# Altium PCB cat-badge2 PCB.PcbDoc
Units mm, origin at the board's own origin, x right, y up, seen from the top; angles counter-clockwise.
Board outline 37.37 x 40.65 mm, 2 copper layers (Top Layer, Bottom Layer); 7 components, 5 nets, 18 pads, 0 vias.
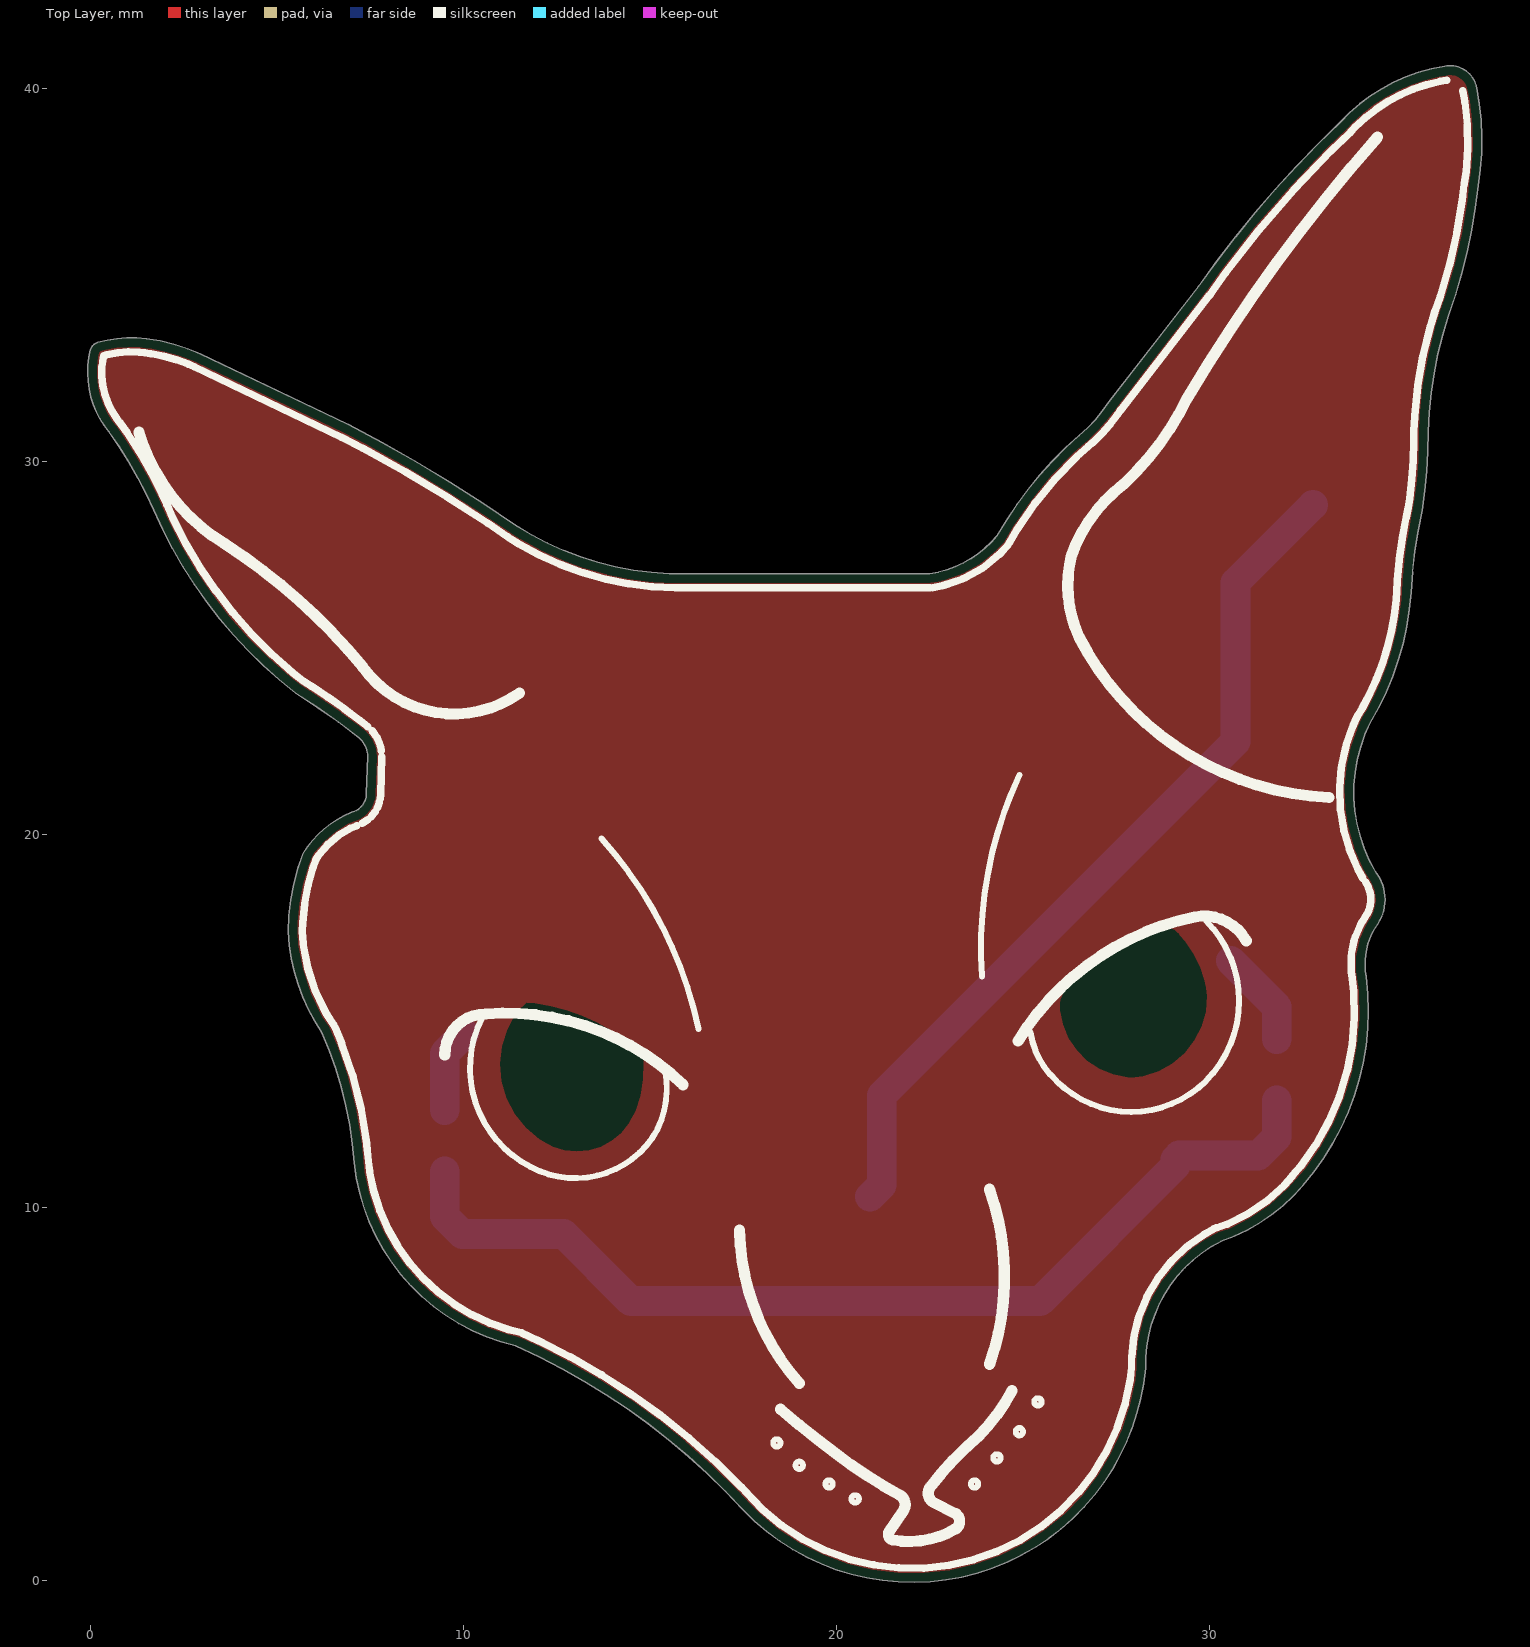
[diagram p0: Top Layer view]
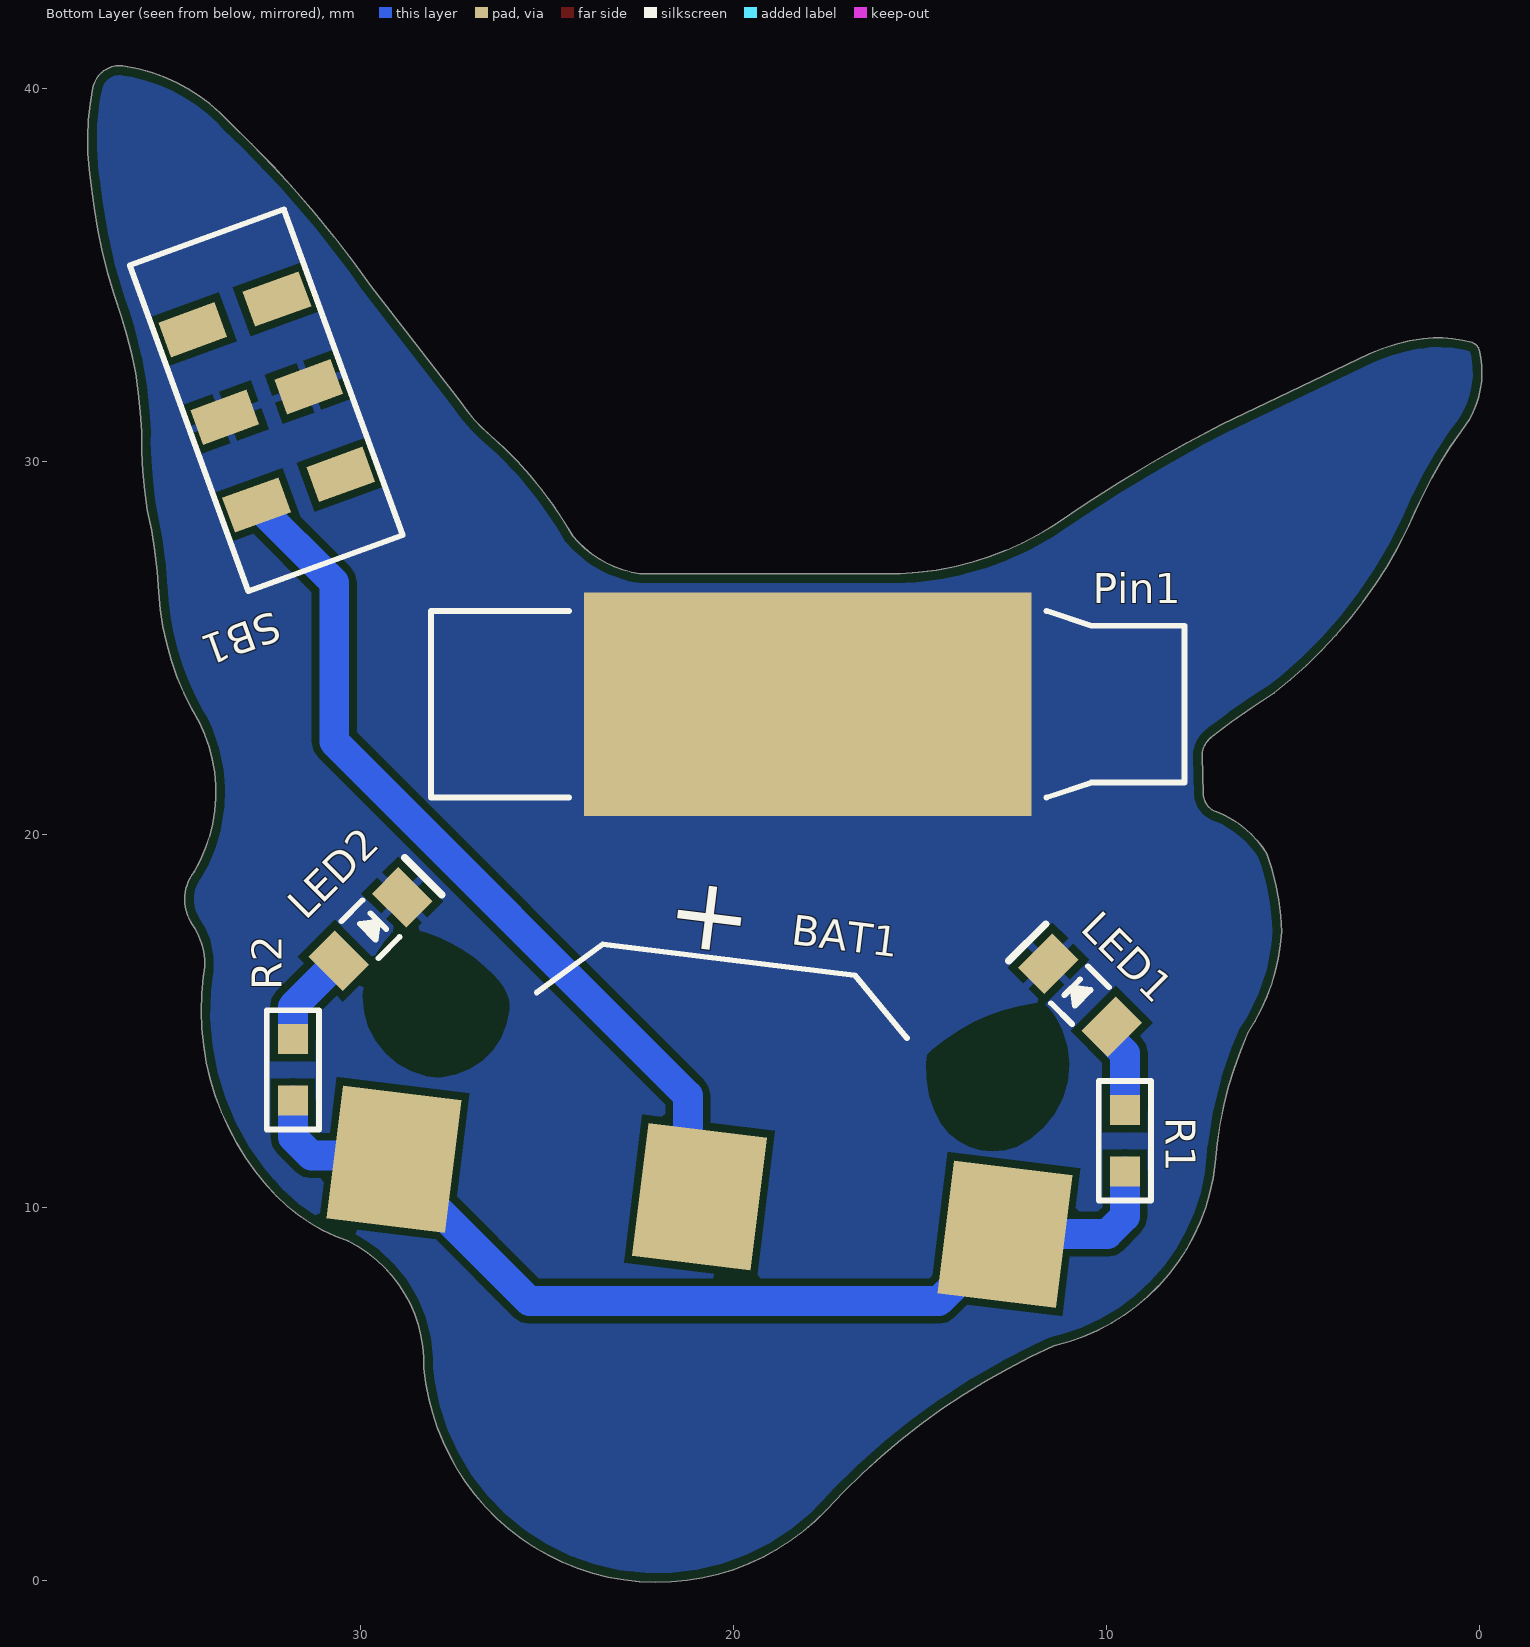
[diagram p1: Bottom Layer view, seen from below]
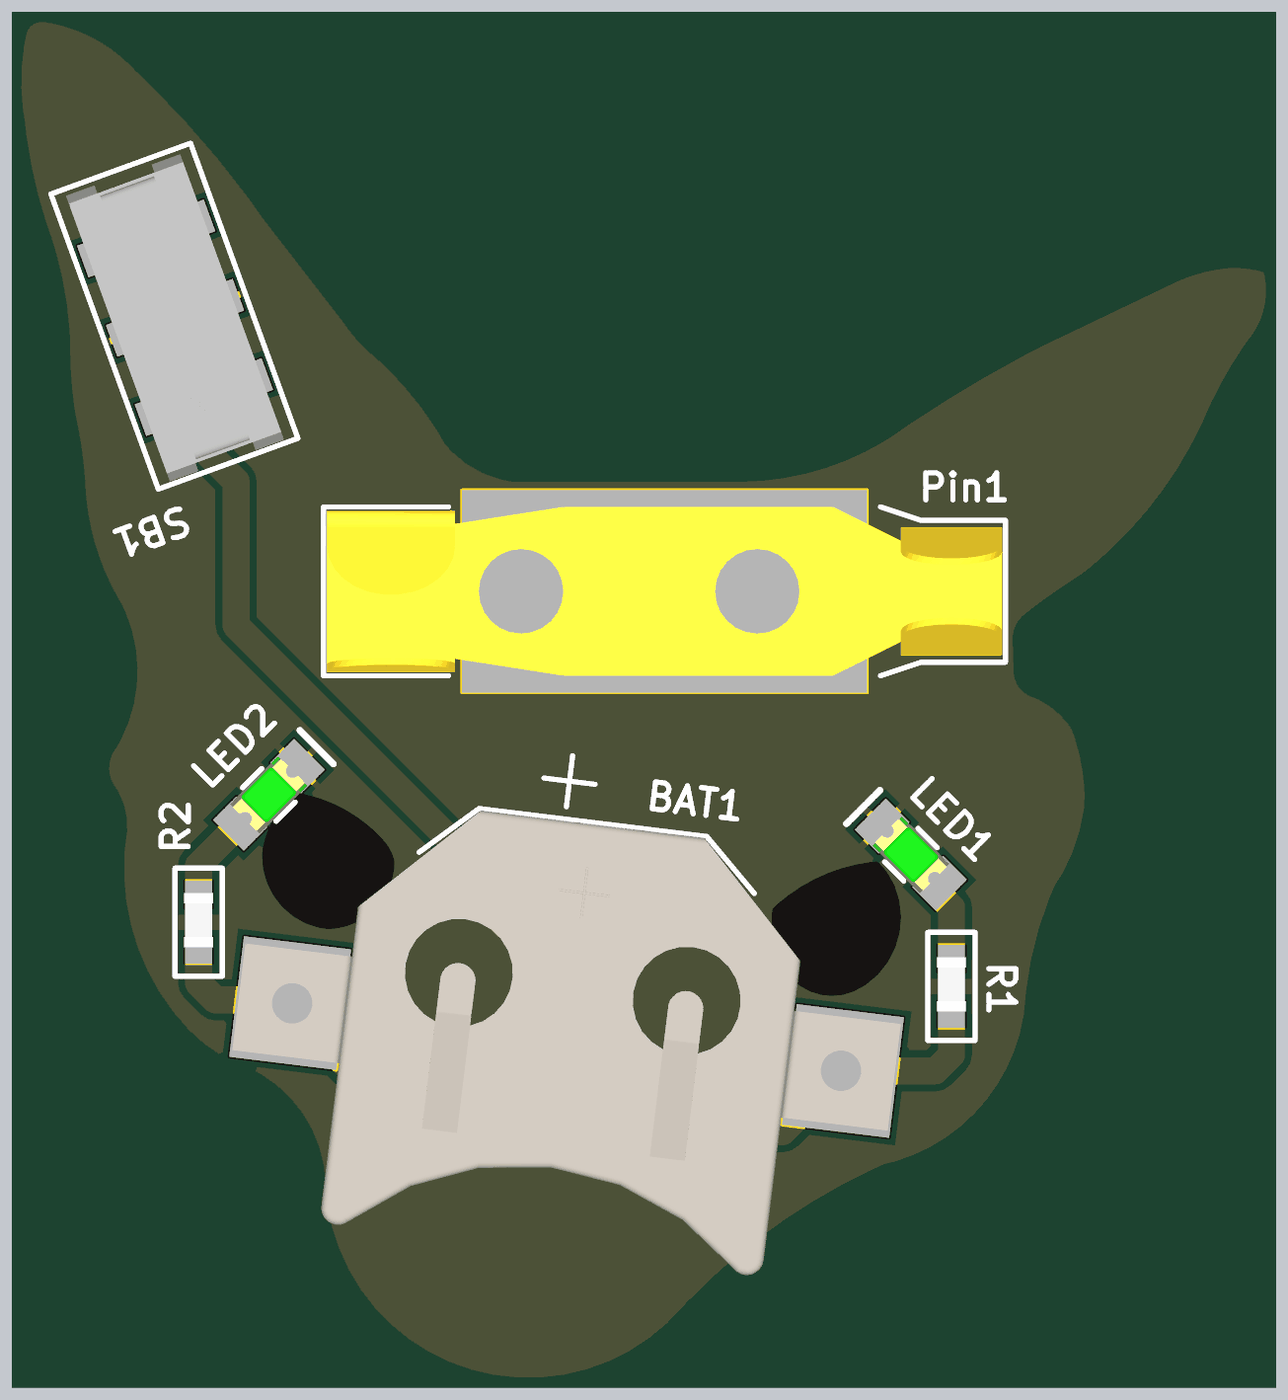
[diagram p2: 3D render of the assembled board from below, using the file's embedded part models]

## Layer stack, top to bottom
Top Solder: solder mask 0.0102, Solder Resist, Dk 3.5
Top Layer: signal copper 0.0356
Dielectric 1: dielectric 0.32, FR-4, Dk 4.8
Bottom Layer: signal copper 0.0356
Bottom Solder: solder mask 0.0102, Solder Resist, Dk 3.5

## Board outline
6.2,14.7 cw(c10.7,17.7) 5.3,17.4 cw(c11.745,17.261) 5.7,19.5 cw(c8.024,18.072) 7,20.6 ccw(c6.867,21.117) 7.4,21.1 7.431,22.1 ccw(c6.775,22.1) 7.2,22.6 ccw(c-4.45,7.9) 5.5,23.8 cw(c13.177,33.677) 1.7,28.7 ccw(c-9.05,23.95) 0.5,30.8 cw(c2.45,32.4) 0,33 cw(c0.3,32.9) 0.2,33.2 cw(c1.1,30) 1.5,33.3 cw(c0.85,28.25) 2.942,32.892 6.9,31 cw(c-11.31,-4.45) 11.4,28.3 ccw(c15.797,35.07) 16,27 22.5,27 ccw(c22.087,29.842) 24.303,28.015 cw(c33.333,22.867) 26.5,30.7 ccw(c23.75,33.95) 27.3,31.6 29.7,34.7 cw(c54.217,17.367) 33.5,39.1 cw(c37.06,35.819) 36.3,40.6 cw(c36.446,39.891) 37.158,40.019 cw(c30.103,38.596) 37.2,37.4 cw(c22.119,39.006) 36.4,33.9 ccw(c46.95,30.45) 35.856,30.801 cw(c22.916,30.704) 35.7,28.7 ccw(c47.85,25.923) 35.4,26.5 cw(c27.675,27.005) 34.3,23 ccw(c38.06,21.14) 34.446,19.009 cw(c33.497,18.268) 34.5,17.6 ccw(c35.983,16.55) 34.2,16.2 cw(c27.088,15.301) 32.5,10.6 cw(c28.681,13.837) 30.3,9.1 ccw(c31.955,5.826) 28.289,5.701 cw(c21.73,6.362) 27.4,3 cw(c22.03,6.232) 17.5,1.9 ccw(c3.896,-10.531) 11.4,6.3 cw(c12.685,11.793) 7.075,11.205 ccw(c-3.3,10.466)

## Design rules (kind name [scope] priority, off if disabled: settings)
AcuteAngle [All] p1: minimum=3.50000000000000E+0001 checktracksonly=FALSE
BoardOutlineClearance "BoardOutlineClearance 1" [All] p1: gap=0.25 ignorepadtopadclearanceinfootprint=FALSE except(0: Arc-SplitContinuation Track-SplitContinuation SMDPad-SplitContinuation THPad-SplitContinuation Via-SplitContinuation Fill-SplitContinuation Poly-SplitContinuation Region-SplitContinuation Text-SplitContinuation) // Milling
BoardOutlineClearance "BoardOutlineClearance 2" [All] p2: gap=0.4 ignorepadtopadclearanceinfootprint=FALSE except(0: Arc-SplitContinuation Track-SplitContinuation SMDPad-SplitContinuation THPad-SplitContinuation Via-SplitContinuation Fill-SplitContinuation Poly-SplitContinuation Region-SplitContinuation Text-SplitContinuation) // V-Cut
Clearance "Clearance-1 1 Oz" [All] p1: gap=0.2 ignorepadtopadclearanceinfootprint=FALSE except(0.25: Arc-Hole Track-Hole SMDPad-Hole THPad-Hole Via-Hole Fill-Hole Poly-Hole Region-Hole Text-Hole) // Standart
DiffPairsRouting "DiffPairsRouting 1 Oz" [All] p1: maxlimit=0.254 minlimit=0.2 mostfreqgap=0.254 toplayer_minwidth=0.2 toplayer_maxwidth=0.381 toplayer_prefwidth=0.381 bottomlayer_minwidth=0.2 bottomlayer_maxwidth=0.381 bottomlayer_prefwidth=0.381 maxuncoupledlength=12.7
HoleSize "Minimum HoleSize" [IsPad] p1: absolutevalues=TRUE maxlimit=5.9 minlimit=0.6 maxpercent=80.000 minpercent=20.000
HoleSize "Minimum HoleSize VIA 1" [IsVia] p2: absolutevalues=TRUE maxlimit=5.9 minlimit=0.3 maxpercent=80.000 minpercent=20.000 // Standart
HoleToHoleClearance Hole2HoleClearance [All] p1: gap=0.25 allowstackedmicrovias=FALSE
MinimumAnnularRing "Minimum AR VIA Standart" [IsVia] p1: minimumring=0.15
MinimumAnnularRing "Minimum AR PAD Standart" [IsPAD] p2: minimumring=0.2
MinimumSolderMaskSliver "SolderMask Bridge Standart" [All] p1: minsoldermaskwidth=0.15 // All Masks
MinimumSolderMaskSliver "SolderMask Bridge Advance" [All] p2: minsoldermaskwidth=0.1 // Mask LDI
PlaneClearance "PlaneClearance 1 Oz" [All] p1: clearance=0.2
PlaneConnect "TermalConnect-1 1 Oz" [All] p1: planeconnectstyle=Relief reliefexpansion=0.2 reliefentries=4 reliefconductorwidth=0.2 reliefairgap=0.2 // Standart
PolygonConnect "PolygonConnect-1 1 Oz" [All] p1: thpad.connectstyle=Relief thpad.reliefconductorwidth=0.2 thpad.reliefentries=4 thpad.polygonreliefangle="90 Angle" thpad.airgapwidth=0.2 smdpad.connectstyle=Relief smdpad.reliefconductorwidth=0.2 smdpad.reliefentries=4 smdpad.polygonreliefangle="90 Angle" smdpad.airgapwidth=0.2 via.connectstyle=Direct via.reliefconductorwidth=0.254 via.reliefentries=4 via.polygonreliefangle="90 Angle" via.airgapwidth=0.254 // Standart
RoomDefinition cat-badge [InComponentClass('cat-badge')] p1: confinementstyle=ConfineIn formatcopy=TRUE lockcomponents=FALSE outline 7.478,-0.636 38.078,-0.636 38.078,37.764 7.478,37.764
RoutingCorners [All] p1 off: cornerstyle=45-Degree minsetback=2.54 maxsetback=2.54
RoutingVias [All] p1: holewidth=0.3 width=0.6 viastyle="Through Hole" minholewidth=0.2 minwidth=0.4 maxholewidth=5.9 maxwidth=6.4
SilkToSilkClearance Silk2SilkClearance [All] p1 off: silktosilkclearance=0.15
SilkToSolderMaskClearance Silk2SolderMaskClearance [IsPad] p1 off: minsilkscreentomaskgap=0.15 clearancetoexposedcopper=TRUE
SolderMaskExpansion SolderMaskExpansion-1 [All] p1: expansion=0.05 istentingtop=FALSE // Standart
UnRoutedNet [All] p1: checkbadconnections=TRUE
Width "Width 1 Oz" [All] p1: maxlimit=10 minlimit=0.15 preferedwidth=0.2 checkconnectedcopper=TRUE
20 further rules are at their usual default settings.

## Components (designator, comment, footprint, x,y, rotation, side; value= is the part's Value field where it differs from the comment)
BAT1 "KEYS3000" KEYS3000 20.9,10.3 r7 bottom
LED1 "LTST-C171GKT" LED0805 10.7,15.7 r45 bottom value=2.1V
LED2 "LTST-C171GKT" LED0805 29.719,17.471 r135 bottom value=2.1V
Pin1 "DC-309/5" DC-309/5 18,23.5 r180 bottom
R1 "1k1" RES0603 9.5,11.8 r270 bottom
R2 "1k1" RES0603 31.8,13.7 r270 bottom
SB1 "JS202011JCQN" JS202011JCQN 32.5,31.6 r250 bottom

## Footprints (in the part's own frame and the unit in brackets; to place one, negate y for a bottom-side part, rotate by r counter-clockwise, add the part's x,y. Pads: shape width x height; smd on the part's side, far side on the other; paste and mask are expansions set on the pad)
DC-309/5 [mm]
  rect 12x6 smd: 1(0,0)
  silkscreen extent -10.1,-2.5 10.1,2.5, body extent -10,-2.5 10,2.5, height 5.1
JS202011JCQN [mm]
  rect 1x1.6 smd: 1(-2.5,-1.2) 2(0,-1.2) 3(2.5,-1.2) 5(2.5,1.2) 6(0,1.2) 7(-2.5,1.2)
  silkscreen extent -4.7,-2.2 4.6,2.2, body extent -4.5,-1.8 4.5,1.8, height 5.6
KEYS3000 [mm]
  rect 3.2x3.6 smd: 1(-8.25,0) 1(8.25,0) 2(0,0)
  silkscreen extent -5,-6.4 5,-4.9, body extent -9.78,-6.35 9.78,6.35, height 3.17
LED0805 [mm]
  rect 1x1.3 smd: A(-1.2,0) C(1.2,0)
  silkscreen extent -0.4,-0.7 2,0.7, body extent -1.01,-0.62 1.01,0.63, height 1.1
RES0603 [mm]
  rect 0.8x0.8 smd: 1(-0.825,0) 2(0.825,0)
  silkscreen extent -1.6,-0.7 1.6,0.7, body extent -0.86,-0.43 0.74,0.43, height 0.48

## Part data
BAT1: "Coin Cell Battery Holders SMT HOLDER FOR CR1220", Case=BH611220-P, Manufacturer=KEYSTONE, Supplier Part Number 1=48852, Category="Coin Cell Battery Holders", HelpURL=https://static.chipdip.ru/lib/181/DOC014181351.pdf, Item="2032 battery holder", Part Number=KEYS3000, Supplier 1=BelChip
LED1 LED2: "Standard LEDs - SMD Green Clear 569nm", Case=0805, Color=Green, Manufacturer=Lite-On, Supplier Part Number 1=859-LTST-C171GKT, Category="Standard LEDs - SMD", HelpURL=https://www.mouser.com/datasheet/2/239/Lite-On-LTST-C171GKT-1175279.pdf, Imax=20mA, Item=LTST-C171GKT, Part Number=LTST-C171GKT, Supplier 1=Mouser
Pin1: "Bar pin 20mm", Case=none, Category=Mechanical, HelpURL=none, Item="Bar-pin 20mm", Manufacturer=none, Part Number=DC-309/5, Supplier 1=none, Supplier Part Number 1=none
R1 R2: library part ERJ-3EKF1101V, "Tolerance ±1% / Power (Watts) 0.1W, 1/10W / Temperature Coefficient ±100ppm/°C", Case=0603, Manufacturer=Panasonic, Supplier Part Number 1=667-ERJ-3EKF1101V, Tolerance=1%, Category="Thin Film Resistors - SMD", HelpURL=https://eu.mouser.com/datasheet/2/315/AOA0000C304-1149620.pdf, Item="1k1  ±1% 0.1W", Part Number=ERJ-3EKF1101V, Supplier 1=Mouser
SB1: "Slide Switches DPDT .3A", Case=SMD/SMT, Manufacturer="C&K Switches", Category="Slide Switches", HelpURL=https://www.ckswitches.com/media/1422/js.pdf, Item=JS202011JCQN, Mechanical Life=N/A, Part Number=JS202011JCQN, Supplier=Chip-Dip, Switch Function="ON  - ON", Vdss=6V

## Nets (pads, with @x,y where several pads share a name; then routed paths per layer and width w, separated by ;. In a path a pad name is that pad's centre, name@x,y a point inside that pad or via, vN(x,y) a via of type N, cw(c..) or ccw(c..) an arc to the next point about the centre after c; other vN are vias at no path point)
GND: LED1.C LED2.C Pin1.1 SB1.2 SB1.6
NetBAT1_1: BAT1.1 R1.2 R2.2 | length 27.3
  Bottom Layer w0.8: R1.2 9.5,9.769 9.969,9.3 12.688,9.3 14.488,7.5 25.457,7.5 29.089,11.131 29.089,11.305 29.183,11.4 31.3,11.4 31.8,11.9 R2.2
NetBAT1_2: BAT1.2 SB1.3 | length 23.5
  Bottom Layer w0.8: BAT1.2 21.213,10.613 21.213,13.013 30.693,22.493 30.693,26.76 SB1.3
NetLED1_A: LED1.A R1.1 | length 2.3
  Bottom Layer w0.8: R1.1 9.5,14.146 LED1.A@10.034,14.68
NetLED2_A: LED2.A R2.1 | length 2.6
  Bottom Layer w0.8: LED2.A 31.8,15.39 R2.1
pads on no net: SB1.1 SB1.5 SB1.7

## Polygon pours and split planes (outlines as drawn)
no net on Mechanical 3 "NONET_L-01_P-001" (solid, pour order 0): 12.258,11.721 cw(c13.368,13.789) 11.3,14.9 cw(c11.607,14.765) 11.6,15.1 cw(c11.121,7.661) 14.7,14.2 cw(c14.5,13.85) 14.9,13.8 cw(c9.464,14.946) 14.579,12.778 cw(c12.89,13.41)
no net on Mechanical 3 "NONET_L-01_P-001" (solid): 28,13.5 cw(c28,15.5) 26,15.5 cw(c27.25,15.25) 26.3,16.1 cw(c29.623,13.161) 28.7,17.5 cw(c28.8,17.025) 29.2,17.3 cw(c26.95,15.3) 29.9,15.9 cw(c27.75,15.65)
no net on Top Solder "NONET_L-01_P-001" (solid): 25.3,14.8 ccw(c27.85,15.35) 28.4,12.8 ccw(c27.85,15.55) 30.6,16.1 ccw(c27.417,15.363) 29.7,17.7 ccw(c31.549,10.106)
no net on Top Solder "NONET_L-01_P-001" (solid): 12.9,10.9 cw(c13.1,13.7) 10.3,13.9 cw(c14.25,13.55) 10.6,15.1 cw(c11.421,13.707) 11.7,15.3 cw(c10.892,8.953) 15.394,13.499 cw(c13,13.3)
no net on Bottom Solder "NONET_L-01_P-001" (solid): 12.258,11.721 cw(c13.418,13.839) 11.3,15 cw(c12.75,14.25) 11.7,15.5 cw(c11.237,10.342) 14.8,14.1 cw(c11.817,13.75) 14.5,12.4 cw(c13.039,13.182)
no net on Top Overlay "NONET_L-01_P-001" (none, remove dead copper): 6.2,14.7 cw(c10.7,17.7) 5.3,17.4 cw(c11.745,17.261) 5.7,19.5 cw(c8.024,18.072) 7,20.6 ccw(c6.867,21.117) 7.4,21.1 7.431,22.1 ccw(c6.775,22.1) 7.2,22.6 ccw(c-4.45,7.9) 5.5,23.8 cw(c13.177,33.677) 1.7,28.7 ccw(c-9.05,23.95) 0.5,30.8 cw(c2.45,32.4) 0,33 cw(c0.3,32.9) 0.2,33.2 cw(c1.1,30) 1.5,33.3 cw(c0.85,28.25) 2.942,32.892 6.9,31 cw(c-11.31,-4.45) 11.4,28.3 ccw(c15.797,35.07) 16,27 22.5,27 ccw(c22.087,29.842) 24.303,28.015 cw(c33.333,22.867) 26.5,30.7 ccw(c23.75,33.95) 27.3,31.6 29.7,34.7 cw(c54.217,17.367) 33.5,39.1 cw(c37.06,35.819) 36.3,40.6 cw(c36.446,39.891) 37.158,40.019 cw(c30.103,38.596) 37.2,37.4 cw(c22.119,39.006) 36.4,33.9 ccw(c46.95,30.45) 35.856,30.801 cw(c22.916,30.704) 35.7,28.7 ccw(c47.85,25.923) 35.4,26.5 cw(c27.675,27.005) 34.3,23 ccw(c38.06,21.14) 34.446,19.009 cw(c33.497,18.268) 34.5,17.6 ccw(c35.983,16.55) 34.2,16.2 cw(c27.088,15.301) 32.5,10.6 cw(c28.681,13.837) 30.3,9.1 ccw(c31.955,5.826) 28.289,5.701 cw(c21.73,6.362) 27.4,3 cw(c22.03,6.232) 17.5,1.9 ccw(c3.896,-10.531) 11.4,6.3 cw(c12.685,11.793) 7.075,11.205 ccw(c-3.3,10.466)
no net on Top Layer "NONET_L-01_P-001" (solid, pour order 3): 6.2,14.7 cw(c10.7,17.7) 5.3,17.4 cw(c11.745,17.261) 5.7,19.5 cw(c8.024,18.072) 7,20.6 ccw(c6.867,21.117) 7.4,21.1 7.431,22.1 ccw(c6.775,22.1) 7.2,22.6 ccw(c-4.45,7.9) 5.5,23.8 cw(c13.177,33.677) 1.7,28.7 ccw(c-9.05,23.95) 0.5,30.8 cw(c2.45,32.4) 0,33 cw(c0.3,32.9) 0.2,33.2 cw(c1.1,30) 1.5,33.3 cw(c0.85,28.25) 2.942,32.892 6.9,31 cw(c-11.31,-4.45) 11.4,28.3 ccw(c15.797,35.07) 16,27 22.5,27 ccw(c22.087,29.842) 24.303,28.015 cw(c33.333,22.867) 26.5,30.7 ccw(c23.75,33.95) 27.3,31.6 29.7,34.7 cw(c54.217,17.367) 33.5,39.1 cw(c37.06,35.819) 36.3,40.6 cw(c36.446,39.891) 37.158,40.019 cw(c30.103,38.596) 37.2,37.4 cw(c22.119,39.006) 36.4,33.9 ccw(c46.95,30.45) 35.856,30.801 cw(c22.916,30.704) 35.7,28.7 ccw(c47.85,25.923) 35.4,26.5 cw(c27.675,27.005) 34.3,23 ccw(c38.06,21.14) 34.446,19.009 cw(c33.497,18.268) 34.5,17.6 ccw(c35.983,16.55) 34.2,16.2 cw(c27.088,15.301) 32.5,10.6 cw(c28.681,13.837) 30.3,9.1 ccw(c31.955,5.826) 28.289,5.701 cw(c21.73,6.362) 27.4,3 cw(c22.03,6.232) 17.5,1.9 ccw(c3.896,-10.531) 11.4,6.3 cw(c12.685,11.793) 7.075,11.205 ccw(c-3.3,10.466)
GND on Bottom Layer "NONET_L-01_P-001" (solid, pour order 1): 6.2,14.7 cw(c10.7,17.7) 5.3,17.4 cw(c11.745,17.261) 5.7,19.5 cw(c8.024,18.072) 7,20.6 ccw(c6.867,21.117) 7.4,21.1 7.431,22.1 ccw(c6.775,22.1) 7.2,22.6 ccw(c-4.45,7.9) 5.5,23.8 cw(c13.177,33.677) 1.7,28.7 ccw(c-9.05,23.95) 0.5,30.8 cw(c2.45,32.4) 0,33 cw(c0.3,32.9) 0.2,33.2 cw(c1.1,30) 1.5,33.3 cw(c0.85,28.25) 2.942,32.892 6.9,31 cw(c-11.31,-4.45) 11.4,28.3 ccw(c15.797,35.07) 16,27 22.5,27 ccw(c22.087,29.842) 24.303,28.015 cw(c33.333,22.867) 26.5,30.7 ccw(c23.75,33.95) 27.3,31.6 29.7,34.7 cw(c54.217,17.367) 33.5,39.1 cw(c37.06,35.819) 36.3,40.6 cw(c36.446,39.891) 37.158,40.019 cw(c30.103,38.596) 37.2,37.4 cw(c22.119,39.006) 36.4,33.9 ccw(c46.95,30.45) 35.856,30.801 cw(c22.916,30.704) 35.7,28.7 ccw(c47.85,25.923) 35.4,26.5 cw(c27.675,27.005) 34.3,23 ccw(c38.06,21.14) 34.446,19.009 cw(c33.497,18.268) 34.5,17.6 ccw(c35.983,16.55) 34.2,16.2 cw(c27.088,15.301) 32.5,10.6 cw(c28.681,13.837) 30.3,9.1 ccw(c31.955,5.826) 28.289,5.701 cw(c21.73,6.362) 27.4,3 cw(c22.03,6.232) 17.5,1.9 ccw(c3.896,-10.531) 11.4,6.3 cw(c12.685,11.793) 7.075,11.205 ccw(c-3.3,10.466)

## Other copper
Top Layer:
  pour cut-out: 28,13.5 cw(c28,15.5) 26,15.5 cw(c27.25,15.25) 26.3,16.1 cw(c29.623,13.161) 28.7,17.5 cw(c28.8,17.025) 29.2,17.3 cw(c26.95,15.3) 29.9,15.9 cw(c27.75,15.65)
  pour cut-out: 12.258,11.721 cw(c13.418,13.839) 11.3,15 cw(c12.75,14.25) 11.7,15.5 cw(c11.237,10.342) 14.8,14.1 cw(c11.817,13.75) 14.5,12.4 cw(c13.039,13.182)
Bottom Layer:
  pour cut-out: 28,13.5 cw(c28,15.5) 26,15.5 cw(c27.25,15.25) 26.3,16.1 cw(c29.623,13.161) 28.7,17.5 cw(c28.8,17.025) 29.2,17.3 cw(c26.95,15.3) 29.9,15.9 cw(c27.75,15.65)
  pour cut-out: 12.258,11.721 cw(c13.418,13.839) 11.3,15 cw(c12.75,14.25) 11.7,15.5 cw(c11.237,10.342) 14.8,14.1 cw(c11.817,13.75) 14.5,12.4 cw(c13.039,13.182)

## Silkscreen, mask and mechanical layers (free items; w line width, h text height)
Top Overlay:
  circle w0.153: c24.9,4 r0.1
  circle w0.153: c24.3,3.3 r0.1
  circle w0.153: c23.7,2.6 r0.1
  circle w0.153: c20.5,2.2 r0.1
  circle w0.153: c19.8,2.6 r0.1
  circle w0.153: c19,3.1 r0.1
  circle w0.153: c18.4,3.7 r0.1
  circle w0.153: c25.4,4.8 r0.1
  lines w0.16: 10.5,15.1 ccw(c13.15,13.75) 11.8,11.1 ccw(c13,13.3) 15.2,12.1 ccw(c12.9,13.2) 15.4,13.7 ; 13.7,19.9 cw(c5.529,12.521) 16.3,14.8 ; 23.9,16.2 cw(c34.805,16.973) 24.9,21.6 ; 25.2,14.7 ccw(c27.37,15.03) 25.9,13.4 ccw(c27.9,15.4) 29.9,13.4 ccw(c27.75,15.55) 29.9,17.7
  lines w0.3: 1.3,30.8 ccw(c6.332,32.276) 3.6,27.8 cw(c-5.053,14.374) 7.3,24.5 ccw(c9.75,26.25) 11.5,23.8 ; 9.5,14.1 cw(c10.6,14.1) 10.6,15.2 cw(c11.138,8.39) 15.889,13.299 ; 17.4,9.4 ccw(c23.778,9.527) 19,5.3 ; 18.5,4.6 ccw(c37.048,26.247) 20,3.4 ; 20,3.4 ccw(c27.725,13.474) 21.7,2.3 cw(c21.55,2.05) 21.8,1.9 21.4,1.3 ccw(c21.55,1.25) 21.5,1.1 ccw(c21.95,3.517) 23.2,1.4 ccw(c23.05,1.6) 23.2,1.8 22.6,2.1 cw(c22.75,2.35) 22.5,2.5 cw(c29.05,-2.45) 23.5,3.6 ccw(c20.25,7.43) 24.7,5.1 ; 24.1,5.8 ccw(c17.4,8.15) 24.1,10.5 ; 24.865,14.473 cw(c31.098,10.636) 29.6,17.8 cw(c29.846,16.516) 30.982,17.162 ; 33.2,21 cw(c33.573,28.95) 26.5,25.3 cw(c29.535,26.685) 26.3,27.5 cw(c30.23,26.07) 27.7,29.4 ccw(c22.272,35.191) 29.4,31.7 cw(c69.33,7.966) 34.5,38.7
Bottom Solder:
  region: 28,13.5 cw(c28,15.5) 26,15.5 cw(c27.25,15.25) 26.3,16.1 cw(c29.623,13.161) 28.7,17.5 cw(c28.8,17.025) 29.2,17.3 cw(c26.95,15.3) 29.9,15.9 cw(c27.75,15.65)
Mechanical 1:
  drawing of 25023 lines, arcs and shapes, not listed
Board:
  lines w0.1: 0,33 cw(c0.3,32.9) 0.2,33.2 cw(c1.1,30) 1.5,33.3 cw(c0.85,28.25) 2.942,32.892 6.9,31 cw(c-11.31,-4.45) 11.4,28.3 ccw(c15.797,35.07) 16,27 19.3,27 22.5,27 ccw(c22.087,29.842) 24.303,28.015 cw(c33.333,22.867) 26.5,30.7 ccw(c23.75,33.95) 27.3,31.6 29.7,34.7 cw(c54.217,17.367) 33.5,39.1 cw(c37.06,35.819) 36.3,40.6 cw(c36.446,39.891) 37.158,40.019 cw(c30.103,38.596) 37.2,37.4 cw(c22.119,39.006) 36.4,33.9 ccw(c46.95,30.45) 35.856,30.801 cw(c22.916,30.704) 35.7,28.7 ccw(c47.85,25.923) 35.4,26.5 cw(c27.675,27.005) 34.3,23 ccw(c38.06,21.14) 34.446,19.009 cw(c33.497,18.268) 34.5,17.6 ccw(c35.983,16.55) 34.2,16.2 cw(c27.088,15.301) 32.5,10.6 cw(c28.681,13.837) 30.3,9.1 ccw(c31.955,5.826) 28.289,5.701 cw(c21.73,6.362) 27.4,3 cw(c22.03,6.232) 17.5,1.9 ccw(c3.896,-10.531) 11.4,6.3 cw(c12.685,11.793) 7.075,11.205 ccw(c-3.3,10.466) 6.2,14.7 cw(c10.7,17.7) 5.3,17.4 cw(c11.745,17.261) 5.7,19.5 cw(c8.024,18.072) 7,20.6 ccw(c6.867,21.117) 7.4,21.1 7.431,22.1 ccw(c6.775,22.1) 7.2,22.6 ccw(c-4.45,7.9) 5.5,23.8 cw(c13.177,33.677) 1.7,28.7 ccw(c-9.05,23.95) 0.5,30.8 cw(c2.45,32.4) 0,33
Mechanical 3:
  pour cut-out: 12,14.1 cw(c12.05,14.35) 11.8,14.4 cw(c12.15,14.25) 12.3,14.6 cw(c12.25,14.45) 12.4,14.4 cw(c12.05,14.45)
  pour cut-out: 12,14.1 cw(c12.05,14.35) 11.8,14.4 cw(c12.15,14.25) 12.3,14.6 cw(c12.25,14.45) 12.4,14.4 cw(c12.05,14.45)
  lines w0.1: 9.597,13.7 ccw(c12.994,13.559) 15.398,11.154 ccw(c15.115,11.437) 14.833,11.72 cw(c12.994,13.559) 10.398,13.7 ; 9.6,13.7 cw(c10,13.7) 10.4,13.7 ; 25.498,13.098 ccw(c28,15.4) 31.4,15.4 ccw(c31,15.4) 30.6,15.4 cw(c28,15.4) 26.064,13.664 ; 25.5,13.1 cw(c25.783,13.383) 26.066,13.666 ; 10.3,13.9 ccw(c13.1,13.7) 12.9,10.9 ccw(c13,13.3) 15.394,13.499 ccw(c10.892,8.953) 11.7,15.3 ccw(c11.421,13.707) 10.6,15.1 ccw(c14.25,13.55) 10.3,13.9 ; 11.3,14.9 cw(c11.607,14.765) 11.6,15.1 cw(c11.121,7.661) 14.7,14.2 cw(c14.5,13.85) 14.9,13.8 cw(c9.464,14.946) 14.579,12.778 cw(c12.89,13.41) 12.258,11.721 cw(c13.368,13.789) 11.3,14.9 ; 25.3,14.8 cw(c31.549,10.106) 29.7,17.7 cw(c27.417,15.363) 30.6,16.1 cw(c27.85,15.55) 28.4,12.8 cw(c27.85,15.35) 25.3,14.8 ; 26,15.5 ccw(c28,15.5) 28,13.5 ccw(c27.75,15.65) 29.9,15.9 ccw(c26.95,15.3) 29.2,17.3 ccw(c28.8,17.025) 28.7,17.5 ccw(c29.623,13.161) 26.3,16.1 ccw(c27.25,15.25) 26,15.5
  lines w0.153: 11.8,14.4 cw(c12.15,14.25) 12.3,14.6 cw(c12.25,14.45) 12.4,14.4 cw(c12.05,14.45) 12,14.1 cw(c12.05,14.35) 11.8,14.4
  lines w0.3: 18.5,7.4 cw(c25.926,7.411) 19.6,11.3 ; 22.7,11.7 cw(c17.464,6.707) 24.6,7.9
Mechanical 4:
  lines w0.1: 11.3,15 ccw(c13.418,13.839) 12.258,11.721 ccw(c13.039,13.182) 14.5,12.4 ccw(c11.817,13.75) 14.8,14.1 ccw(c11.237,10.342) 11.7,15.5 ccw(c12.75,14.25) 11.3,15

## Text inside footprints (layer, text, board x,y; h text height)
BAT1: Bottom Overlay "+" at 19.392,18.477 h2 r187